# Altium PCB Ararinha_PCB.PcbDoc (part 2 of 2)
Units mm, origin at the board's own origin, x right, y up, seen from the top; angles counter-clockwise.
Board outline 118.49 x 71.75 mm, 4 copper layers (Component Side, GND, VCC, Solder Side), stack 0.844 mm thick; 218 components, 109 nets, 598 pads, 337 vias.
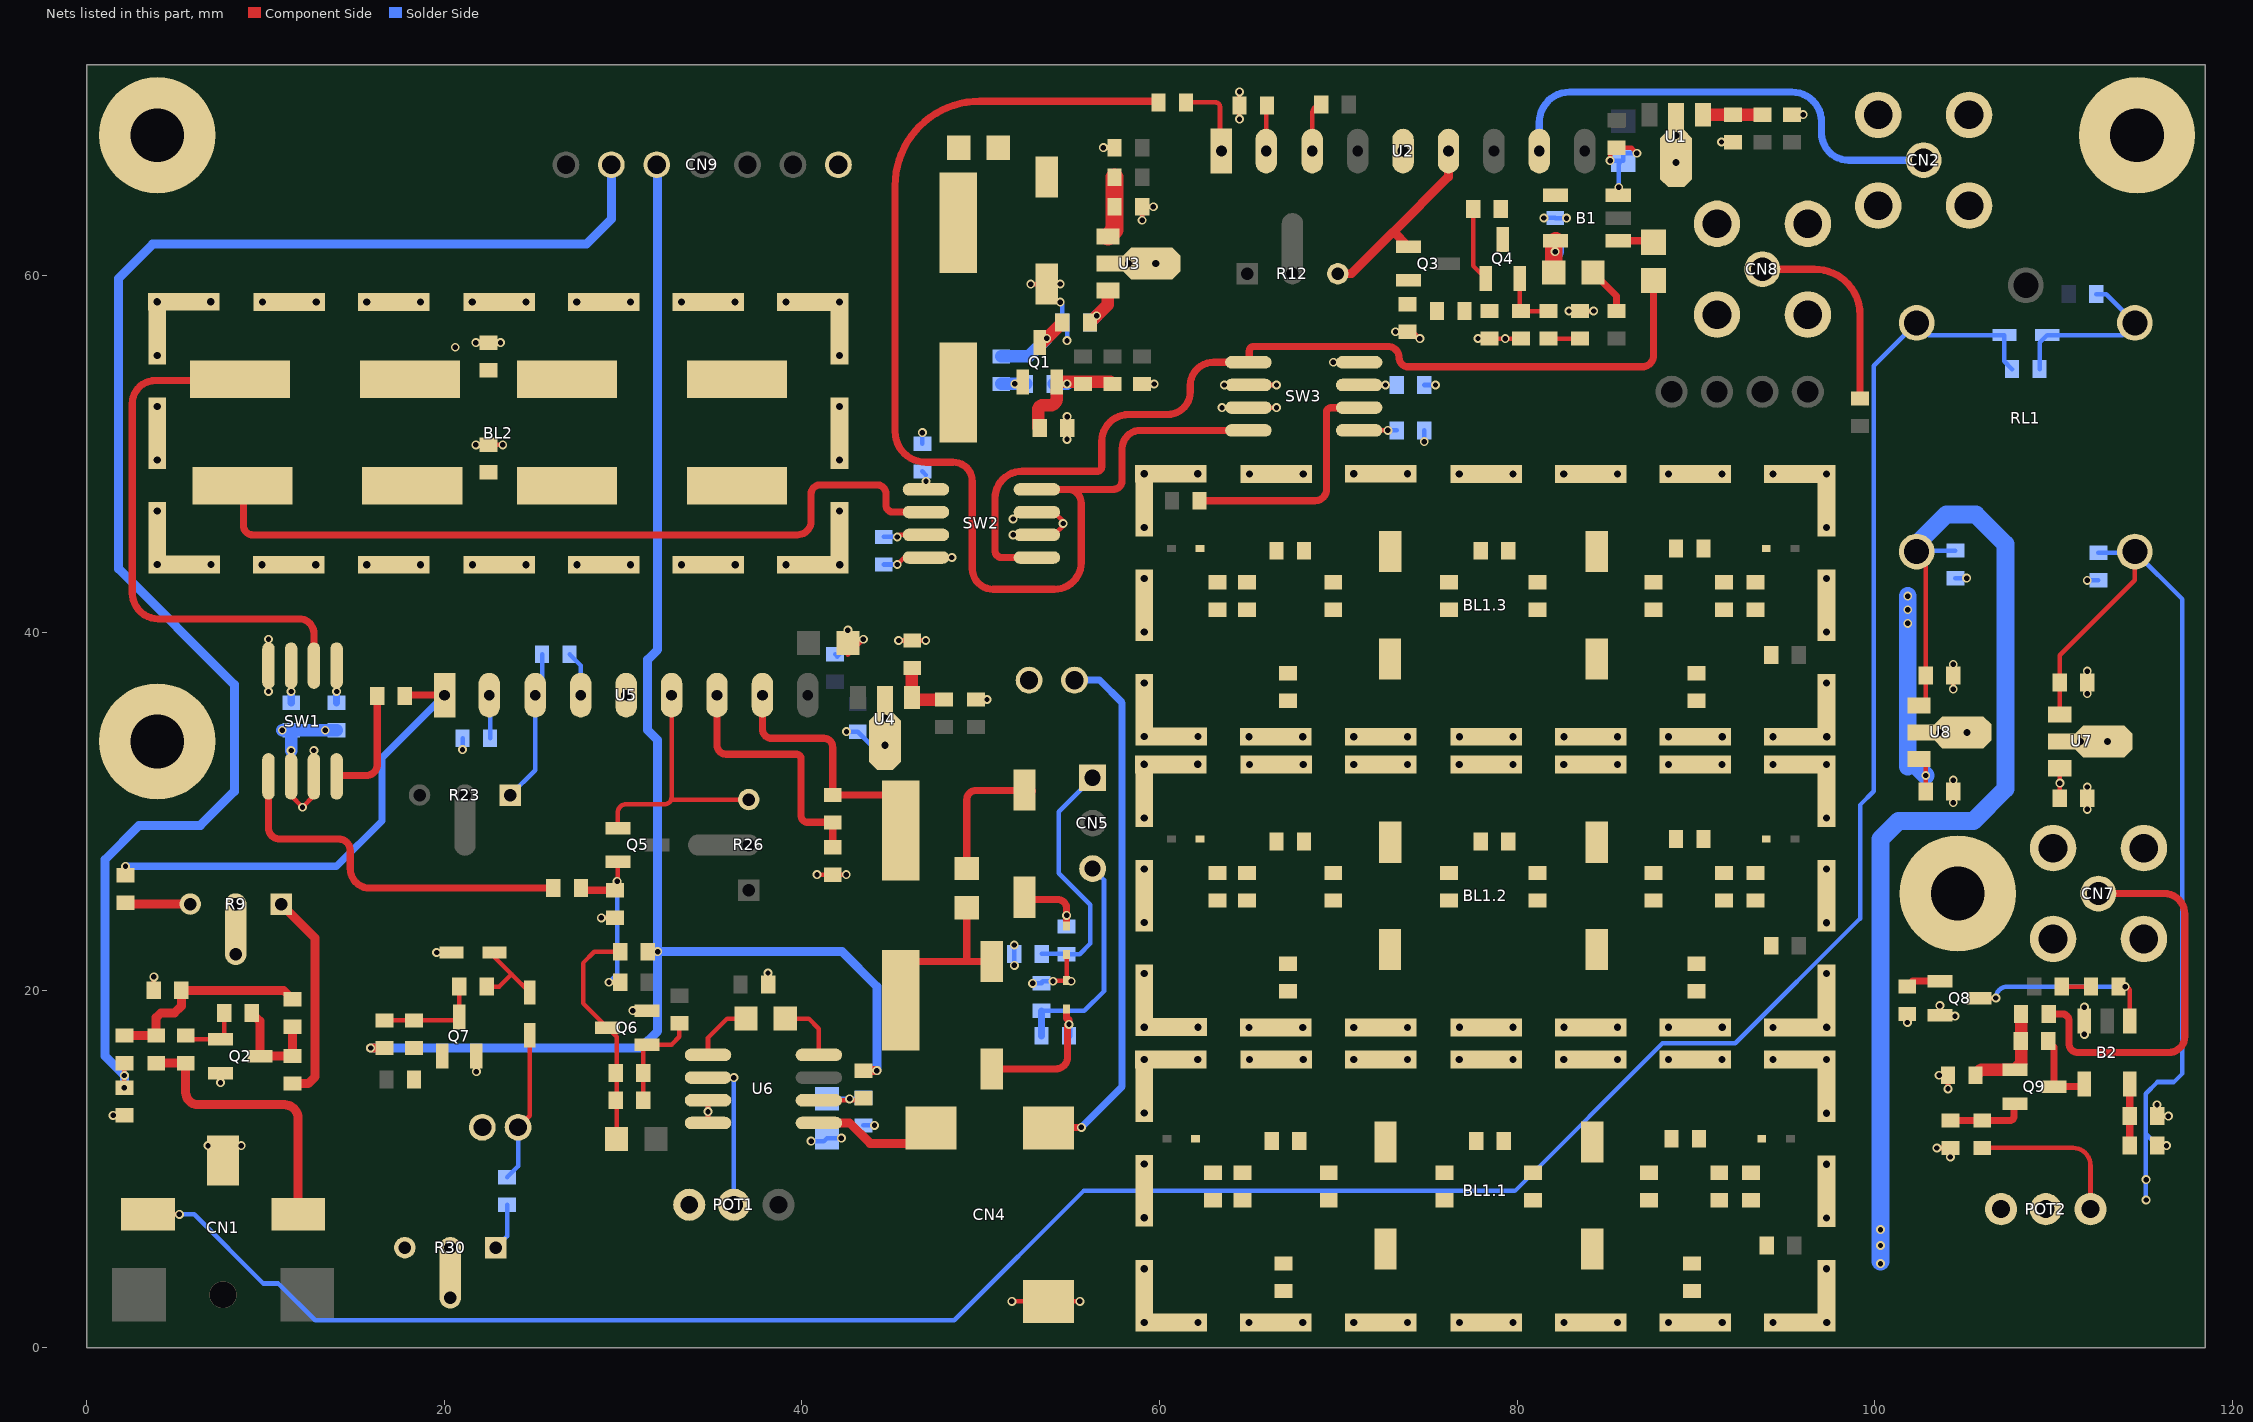
[diagram p4: the nets of this part, all layers, seen from the top]

## Via types
v1: diameter 0.5, hole 0.3, Component Side to Solder Side, 164 vias
v2: diameter 0.7, hole 0.4, Component Side to Solder Side, tented both sides, 162 vias
v3: diameter 1.2, hole 0.7, Component Side to Solder Side, 5 vias
v4: diameter 3.5, hole 2.4, Component Side to Solder Side, tented both sides, 4 vias
v5: diameter 1.5, hole 1.5, Component Side to Solder Side, tented both sides, 2 vias

## Nets (pads, with @x,y where several pads share a name; then routed paths per layer and width w, separated by ;. In a path a pad name is that pad's centre, name@x,y a point inside that pad or via, vN(x,y) a via of type N, cw(c..) or ccw(c..) an arc to the next point about the centre after c; other vN are vias at no path point) (continued)
GND: B1.3 B2.3 BL1.1.1 BL1.2.1 BL1.3.1 BL2.1 C1.1.1 C1.2.1 C1.3.1 C2.1.1 C2.2.1 C2.3.1 C3.2 C4.2 C5.1 C8.2 C9.2 C10.1 C11.1 C14.1 C15.1 C16.1 C17.1 C18.1 C19.2 C20.2 C25.1 C27.2 C28.2 C29.2 C30.1 C32.2 C34.2 C35.1 C36.2 C40.2 C41.2 C42.2 C46.2 C47.1 C49.1 C52.2 C54.1 C58.1 C59.1 C60.1 C61.1 C62.1 C63.1 C64.1 C65.1 C66.1 C67.1 C68.1 C69.1 C70.1 C71.1 CN1.1 CN2.2 CN2.3 CN2.4 CN2.5 CN3.2 CN4.1 CN7.2 CN7.3 CN7.4 CN7.5 CN8.2 CN8.3 CN8.4 CN8.5 CN9.7 D3.2 D4.2 D6.1 D7.1 HOLE1.X HOLE2.X HOLE3.X HOLE4.X POT1.3 POT2.2 POT2.3 Q2.2 Q6.2 Q7.2 Q8.2 R9.2 R14.1 R15.1 R16.1 R20.1 R30.3 R35.1 R36.1 RL1.1 SW1.4 SW1.6 SW1.7 SW2.4 SW2.6 SW2.7 SW3.4 SW3.6 SW3.7 U1.2 U2.5 U3.2 U4.2 U5.5 U6.3 U6.4 U7.2 U8.2 | length 114.5
  Component Side w0.254: v1@1.466,13.003 v1(1.474,12.995) C20.2@2.101,12.995 ; C19.2@3.744,19.988 v1(3.744,20.742) ; v1(6.774,11.303) cw(c6.774,10.457) CN1.1@7.62,10.457 cw(c8.466,10.457) 8.466,11.303 v1(8.636,11.303) ; v1(7.478,14.824) Q2.2@7.478,15.355 ; v1(10.16,36.703) SW1.4@10.16,38.152 v1(10.16,39.624) ; v1(11.43,33.401) SW1.6@11.43,31.952 11.43,30.861 v1(12.065,30.226) 12.7,30.861 SW1.7@12.7,31.952 v1(12.7,33.401) ; v1(19.566,22.104) D6.1@20.398,22.104 ; v1@21.752,50.512 v1(21.762,50.502) C18.1@22.47,50.502 v1(23.266,50.502) v1@23.276,50.512 ; v1(21.762,56.217) C17.1@22.47,56.217 v1(23.139,56.217) ; v1(21.786,15.434) Q7.2@21.786,16.305 ; v1(28.779,24.044) R20.1@29.533,24.044 ; v1(30.546,18.85) Q6.2@31.326,18.85 ; U6.4@34.746,12.566 U6.3@34.746,13.836 ; v1(38.1,20.955) 38.108,20.947 C49.1@38.108,20.313 ; v1(40.844,26.457) C25.1@41.725,26.457 v1(42.479,26.457) ; v1(42.571,40.138) C30.1@42.571,39.419 42.571,38.761 v1(43.434,39.624) ; v1(45.331,43.807) 45.72,44.196 SW2.4@46.938,44.196 v1(48.387,44.196) ; v1(45.408,39.554) C29.2@46.17,39.554 v1(46.924,39.554) v1@46.932,39.546 ; C28.2@49.726,36.252 v1(50.353,36.252) v1@50.361,36.244 ; v1(51.745,2.589) CN4.1@53.79,2.589 v1(55.548,2.589) ; v1(51.816,45.466) SW2.6@53.138,45.466 ; v1(51.816,46.355) 52.197,46.736 SW2.7@53.138,46.736 54.102,46.736 54.61,46.228 54.61,45.974 SW2.6@54.102,45.466 ; v1(52.798,59.489) C15.1@53.687,59.489 ; v1(54.044,20.496) cw(c54.082,20.496) 54.082,20.534 D3.2@54.806,20.534 ; v1(54.449,58.484) 54.322,58.484 53.948,58.857 cw(c54.58,59.489) C15.1@53.687,59.489 ; v1(54.449,59.5) 53.687,59.5 C15.1@53.687,59.489 ; D4.2@54.806,21.982 D3.2@54.806,20.534 ; v1(54.83,50.81) 54.83,51.445 C14.1@54.838,51.445 v1(54.838,52.08) ; v1(55.06,20.496) 54.844,20.496 cw(c54.844,20.534) D3.2@54.806,20.534 ; v1(56.862,67.12) C10.1@57.243,67.12 ; C16.1@59.021,53.904 v1(59.702,53.904) ; v1(59.029,63.064) C35.1@59.029,63.818 v1(59.656,63.818) ; v1(63.5,52.578) SW3.7@64.972,52.578 v1(66.548,52.578) ; v1(63.627,53.848) SW3.6@64.972,53.848 v1(66.548,53.848) ; v1(64.474,68.717) C9.2@64.474,69.479 v1(64.474,70.241) ; v1(69.723,55.118) SW3.4@71.172,55.118 ; v1(73.199,56.825) R14.1@73.88,56.825 74.18,56.825 v1(74.561,56.444) ; v1(77.817,56.452) 77.825,56.444 R16.1@80.23,56.444 ; v1(82.905,57.984) C27.2@83.532,57.984 v1(84.286,57.984) ; v1(85.213,66.401) 85.213,66.761 C8.2@85.564,67.112 86.407,67.112 v1(86.707,66.812) ; v1(91.44,67.437) 91.448,67.429 C4.2@92.075,67.429 ; C3.2@95.377,68.969 v1(96.004,68.969) v1@96.012,68.961 ; v1(103.481,11.166) R36.1@104.243,11.166 v1(104.243,10.666) ; v1(103.608,15.238) R35.1@104.108,15.238 v1(104.108,14.476) ; v1(103.651,19.132) Q8.2@103.651,18.606 104.431,18.606 cw(c104.431,18.54) v1(104.497,18.54) ; v1(104.402,30.488) C67.1@104.402,31.115 v1(104.402,31.742) ; v1(104.402,36.838) C66.1@104.402,37.592 v1(104.402,38.219) ; v1(111.736,17.524) B2.3@111.736,18.258 v1(111.736,19.048) ; v1(111.895,30.107) C65.1@111.895,30.734 v1(111.895,31.361) ; v1(111.895,36.584) C64.1@111.895,37.211 v1(111.895,37.838) ; v1(115.8,13.587) 115.808,13.587 C54.1@115.808,12.952 v1(116.435,12.952)
  Solder Side w0.254: C34.2@21.016,34.085 v1(21.016,33.45) v1@21.024,33.45 ; v1(40.513,11.55) 41.232,11.55 C47.1@41.402,11.72 v1(42.207,11.72) ; C42.2@41.852,38.792 41.987,38.657 42.954,39.624 v1(43.434,39.624) ; v1(42.495,34.458) C32.2@43.122,34.458 43.88,33.7 v2(44.646,33.7) ; C46.2@43.434,12.431 v1(44.061,12.431) v1@44.069,12.439 ; C63.1@44.577,43.807 v1(45.331,43.807) ; C60.1@46.736,50.554 v1(46.736,51.181) ; v1(51.877,22.52) C41.2@51.877,22.02 51.877,21.385 v1(51.885,21.385) ; v1@52.901,20.369 v1(52.901,20.377) C40.2@53.409,20.377 cw(c53.528,20.377) 53.528,20.496 v1(54.044,20.496) ; v1(54.449,58.484) 54.568,58.365 C11.1@54.568,57.341 54.83,57.079 v1(54.83,56.325) ; v1(74.811,50.681) C62.1@74.811,51.308 ; C59.1@74.811,53.848 v1(75.438,53.848) ; v1(81.5,63.191) C36.2@82.135,63.191 82.135,63.183 v1(82.77,63.183) ; v1(85.213,66.401) C5.1@85.945,66.401 ; v1(85.691,64.907) 85.691,66.147 cw(c85.945,66.147) C5.1@85.945,66.401 ; v1(86.707,66.812) 85.945,66.812 C5.1@85.945,66.401 ; C71.1@104.521,43.045 v1(105.148,43.045) ; C68.1@109.228,54.737 109.228,56.212 D7.1@109.658,56.642 RL1.1@113.873,56.642 ; v1(111.895,42.918) C70.1@112.522,42.918 ; C69.1@112.403,58.928 112.957,58.928 RL1.1@114.558,57.327
  Solder Side w0.7: v1@10.922,34.544 v1(10.93,34.536) C58.1@11.43,34.536 ; v1(11.43,33.401) C58.1@11.43,34.536 ; C61.1@13.97,34.536 v1(13.335,34.536) C58.1@11.43,34.536
  other v1: 34.746,13.201 54.61,46.101 20.607,55.959 79.341,56.444
  other v2: 65.015,1.407 68.015,1.407 70.865,1.407 73.865,1.407 76.777,1.407 79.777,1.407 82.627,1.407 85.627,1.407 88.477,1.407 91.477,1.407 94.327,1.407 97.326,1.407 59.147,1.415 62.147,1.415 97.317,1.411 59.147,4.415 97.317,4.411 59.147,7.265 97.317,7.261 59.147,10.265 97.317,10.261 59.147,13.115 97.317,13.111 59.147,16.115 65.042,16.108 68.042,16.108 70.865,16.116 73.865,16.116 76.767,16.111 79.767,16.111 82.617,16.111 85.617,16.111 88.467,16.111 91.467,16.111 94.317,16.111 97.317,16.111 59.138,16.119 62.137,16.119 65.015,17.917 68.015,17.917 70.865,17.917 73.865,17.917 76.777,17.917 79.777,17.917 82.627,17.917 85.627,17.917 88.477,17.917 91.477,17.917 94.327,17.917 97.326,17.917 59.147,17.925 62.147,17.925 97.317,17.921 59.147,20.925 97.317,20.921 59.147,23.775 97.317,23.771 59.147,26.775 97.317,26.771 59.147,29.625 97.317,29.621 59.147,32.625 65.042,32.618 68.042,32.618 70.865,32.626 73.865,32.626 76.767,32.621 79.767,32.621 82.617,32.621 85.617,32.621 88.467,32.621 91.467,32.621 94.317,32.621 97.317,32.621 59.138,32.629 62.137,32.629 111.514,33.909 113.034,33.909 65.015,34.173 68.015,34.173 70.865,34.173 73.865,34.173 76.777,34.173 79.777,34.173 82.627,34.173 85.627,34.173 88.477,34.173 91.477,34.173 94.327,34.173 97.326,34.173 59.147,34.181 62.147,34.181 97.317,34.177 103.64,34.417 105.16,34.417 44.646,35.22 59.147,37.181 97.317,37.177 59.147,40.031 97.317,40.027 59.147,43.031 97.317,43.027 3.937,43.799 6.936,43.799 9.804,43.791 12.804,43.791 15.654,43.791 18.654,43.791 21.566,43.791 24.566,43.791 27.416,43.791 30.416,43.791 33.266,43.791 36.266,43.791 39.116,43.791 42.106,43.794 42.116,43.791 59.147,45.881 97.317,45.877 3.936,46.799 42.106,46.794 59.147,48.881 65.042,48.874 68.042,48.874 70.865,48.882 73.865,48.882 76.767,48.877 79.767,48.877 82.617,48.877 85.617,48.877 88.467,48.877 91.467,48.877 94.317,48.877 97.317,48.877 59.138,48.885 62.137,48.885 3.937,49.649 42.106,49.644 3.937,52.649 42.106,52.644 3.937,55.499 42.107,55.494 3.927,58.503 3.937,58.499 6.927,58.503 9.832,58.491 12.831,58.491 15.654,58.499 18.654,58.499 21.557,58.495 24.557,58.495 27.407,58.495 30.407,58.495 33.257,58.495 36.257,58.495 39.107,58.495 42.106,58.495 58.267,60.643 59.787,60.643 88.9,66.29 88.9,67.81
  other v3: 8.324,22.014
  other v5: 7.62,2.957
IF_PRE: Q5.1 R26.3 U5.6 | length 14.4
  Component Side w0.254: Q5.1@29.703,29.066 29.703,29.937 cw(c30.168,29.937) 30.168,30.402 32.327,30.402 ccw(c32.327,30.783) 32.708,30.783 U5.6@32.708,36.498 ; 32.708,30.656 R26.3@37.026,30.656
IFIN: C31.1 SW1.8 | length 6.5
  Component Side w0.4: SW1.8@13.97,31.952 cw(c14.022,31.952) 14.022,32.004 15.621,32.004 ccw(c15.621,32.631) 16.248,32.631 C31.1@16.248,36.449
IFOUT: C38.2 SW1.5 | length 21.2
  Component Side w0.4: SW1.5@10.16,31.952 10.16,29.083 ccw(c10.795,29.083) 10.795,28.448 14.097,28.448 cw(c14.097,27.813) 14.732,27.813 14.732,26.797 ccw(c15.826,26.797) 15.826,25.703 C38.2@26.096,25.703
LSB: C41.1 CN5.1 R22.2 | length 13.8
  Solder Side w0.254: C41.1@53.417,22.02 R22.2@54.806,22.02 ; R22.2@54.806,22.012 55.54,22.012 56.134,22.606 56.134,24.765 54.356,26.543 54.356,29.972 CN5.1@56.261,31.877
MIC: C22.2 CN1.2 R7.1 | length 15.8
  Component Side w0.5: R7.1@3.879,15.916 C22.2@5.53,15.916 5.53,14.282 ccw(c6.223,14.282) 6.223,13.589 11.049,13.589 cw(c11.049,12.827) 11.811,12.827 CN1.2@11.811,7.457
MIXERIN: C6.2 SW2.8 SW3.8 | length 68.8
  Component Side w0.4: SW2.8@53.265,48.133 ccw(c53.265,48.006) 53.213,48.122 ccw(c53.265,48.006) SW2.8@53.138,48.006 54.864,48.006 ; C6.2@59.948,69.652 ccw(c59.876,69.652) 59.876,69.723 49.949,69.723 ccw(c49.949,64.986) 45.212,64.986 45.212,51.242 ccw(c46.924,51.242) 46.924,49.53 48.455,49.53 cw(c48.455,48.455) 49.53,48.455 49.53,43.582 ccw(c50.694,43.582) 50.694,42.418 54.115,42.418 ccw(c54.115,43.929) 55.626,43.929 55.626,47.244 ccw(c54.864,47.244) 54.864,48.006 ; SW3.8@64.972,51.308 58.928,51.308 ccw(c58.928,50.292) 57.912,50.292 57.912,48.514 cw(c57.404,48.514) 57.404,48.006 54.864,48.006
MIXEROUT: R11.2 SW2.5 SW3.5 | length 53.4
  Component Side w0.4: SW2.5@53.138,44.196 51.181,44.196 cw(c51.181,44.577) 50.8,44.577 50.8,47.511 cw(c52.311,47.511) 52.311,49.022 56.515,49.022 ccw(c56.515,49.276) 56.769,49.276 56.769,50.686 cw(c58.28,50.686) 58.28,52.197 60.452,52.197 ccw(c60.452,53.467) 61.722,53.467 61.722,53.817 cw(c63.023,53.817) 63.023,55.118 SW3.5@64.972,55.118 ccw(c64.972,55.17) 65.024,55.17 65.024,55.753 cw(c65.278,55.753) 65.278,56.007 72.771,56.007 cw(c72.771,55.372) 73.406,55.372 ccw(c73.914,55.372) 73.914,54.864 86.995,54.864 ccw(c86.995,55.511) 87.642,55.511 R11.2@87.642,59.692
NetB1_1: B1.1 R11.1 | length 2.1
  Component Side w0.4: B1.1@85.663,61.913 87.669,61.913 cw(c87.669,61.859) R11.1@87.723,61.859
NetB1_4: B1.4 Q4.3 R13.2
NetB1_6: B1.6 C36.1 R10.1 | length 2.2
  Component Side w1: R10.1@82.051,60.135 82.051,61.801 B1.6@82.163,61.913
  Solder Side w1: v1(82.135,61.307) C36.1@82.135,61.651
NetB2_1: B2.1 Q8.3 R32.1 | length 11
  Component Side w0.254: Q8.3@105.851,19.556 v1(106.783,19.556) ; R32.1@113.649,20.191 v1(114.022,20.191) cw(c114.022,19.937) 114.276,19.937 B2.1@114.276,18.258
  Solder Side w0.254: v1(106.783,19.556) cw(c107.418,19.556) 107.418,20.191 v1(114.022,20.191)
NetB2_4: B2.4 Q9.3 R34.2 | length 3.7
  Component Side w0.4: R34.2@110.042,16.813 Q9.3@110.042,14.603 B2.4@111.581,14.603
NetB2_6: B2.6 C54.2 R31.1 | length 3.5
  Component Side w0.4: R31.1@114.268,11.301 114.276,11.309 B2.6@114.276,14.758
NetC1.1_2: C1.1.2 C2.1.2 CF1.1.1 CF3.1.2 CF4.1.1 CF6.1.1 CF7.1.1 CF9.1.2 LF1.1.1 LF2.1.1 R1.1.1 R2.1.1 R3.1.1
NetC1.2_2: C1.2.2 C2.2.2 CF1.2.1 CF3.2.2 CF4.2.1 CF6.2.1 CF7.2.1 CF9.2.2 LF1.2.1 LF2.2.1 R1.2.1 R2.2.1 R3.2.1
NetC1.3_2: C1.3.2 C2.3.2 CF1.3.1 CF3.3.2 CF4.3.1 CF6.3.1 CF7.3.1 CF9.3.2 LF1.3.1 LF2.3.1 R1.3.1 R2.3.1 R3.3.1
NetC4_1: C4.1 L1.2 U1.1 | length 3.3
  Component Side w0.7: U1.1@90.409,68.969 L1.2@93.726,68.969
NetC6_1: C6.1 U2.1 | length 4.6
  Component Side w0.254: C6.1@61.488,69.652 63.131,69.652 cw(c63.131,69.398) 63.385,69.398 63.385,67.015 ccw(c63.466,67.015) U2.1@63.466,66.934
NetC7_2: C7.2 U2.3 | length 2.9
  Component Side w0.254: U2.3@68.546,66.934 68.546,69.033 cw(c69.046,69.033) C7.2@69.046,69.533
NetC9_1: C9.1 U2.2 | length 2.6
  Component Side w0.254: U2.2@65.966,66.934 65.966,69.431 cw(c66.014,69.431) C9.1@66.014,69.479
NetC11_2: C11.2 R18.2 U3.3 | length 2.8
  Component Side w0.7: R18.2@56.108,57.341 57.117,58.35 U3.3@57.117,59.143
  Solder Side w0.7: C11.2@56.108,57.341 56.481,57.714 v1(56.481,57.722)
NetC12_1: C12.1 C13.1 C14.2 Q1.2 R5.2 | length 7.3
  Component Side w0.254: C14.2@53.298,51.445 ccw(c53.298,51.58) C14.2@53.433,51.58
  Component Side w0.7: C14.2@53.298,51.445 cw(c53.298,51.529) 53.213,51.529 53.213,52.451 cw(c53.467,52.451) 53.467,52.705 53.848,52.705 ccw(c53.848,53.113) 54.256,53.113 Q1.2@54.256,54.023 55.719,54.023 C13.1@57.251,54.023
  Solder Side w0.7: C12.1@54.076,53.912 v1(54.83,53.912)
NetC12_2: C12.2 Q1.1 R4.1 X1.2 | length 1.4
  Solder Side w0.7: R4.1@51.147,53.904 C12.2@52.536,53.904
  other v1: 51.909,53.912
NetC15_2: C15.2 L3.1
NetC17_2: C17.2 X2.2 X3.1
NetC18_2: C18.2 X4.2 X5.1
NetC19_1: C19.1 L4.1 R6.2 R7.2 | length 11.8
  Component Side w0.5: L4.1@2.101,17.456 R7.2@3.879,17.456 3.879,18.464 4.133,18.718 4.895,18.718 5.284,19.107 C19.1@5.284,19.988 10.999,19.988 R6.2@11.499,19.488
NetC21_1: C21.1 R9.1 | length 11.9
  Component Side w0.5: R9.1@10.864,24.814 12.769,22.909 12.769,15.162 12.38,14.773 C21.1@11.499,14.773
NetC21_2: C21.2 Q2.3 R6.1 R8.2 | length 6.1
  Component Side w0.5: R8.2@9.221,18.718 9.678,18.261 Q2.3@9.678,16.305 ; Q2.3@9.686,16.313 C21.2@11.499,16.313 R6.1@11.499,17.948
NetC22_1: C22.1 Q2.1 R8.1 | length 3.1
  Component Side w0.254: C22.1@5.731,17.255 Q2.1@7.478,17.255 Q2.1@7.605,17.255 ; Q2.1@7.681,17.458 R8.1@7.681,18.718
NetC23_2: C23.2 R9.3 | length 3.5
  Component Side w0.5: C23.2@2.228,24.822 R9.3@5.776,24.822
NetC24_1: C24.1 C25.2 U5.7 | length 14.5
  Component Side w0.4: U5.7@35.248,36.498 35.248,33.704 ccw(c35.756,33.704) 35.756,33.196 39.693,33.196 cw(c39.693,32.942) 39.947,32.942 39.947,29.767 ccw(c40.328,29.767) 40.328,29.386 C24.1@41.725,29.386 ; C25.2@41.725,27.997 C24.1@41.725,29.378
NetC24_2: C24.2 U5.8 X6.2 | length 12.9
  Component Side w0.4: U5.8@37.788,36.498 37.788,34.593 ccw(c38.296,34.593) 38.296,34.085 41.217,34.085 cw(c41.217,33.577) 41.725,33.577 C24.2@41.725,30.918 X6.2@45.535,30.918
NetC26_1: C26.1 Q4.1 R13.1 R15.2 | length 4.2
  Component Side w0.254: R13.1@77.555,63.691 77.555,60.506 Q4.1@78.264,59.797
NetC26_2: C26.2 Q3.2 R14.2
NetC27_1: C27.1 R17.1 | length 1.8
  Component Side w0.254: R17.1@81.754,56.444 C27.1@83.532,56.444
NetC29_1: C29.1 L5.2 U4.1 | length 3.3
  Component Side w0.7: U4.1@46.146,36.37 C29.1@46.146,37.99 ; U4.1@46.264,36.252 L5.2@47.948,36.252
NetC33_1: C33.1 U5.4 | length 2.5
  Solder Side w0.254: C33.1@27.001,38.784 27.628,38.157 U5.4@27.628,36.498
NetC33_2: C33.2 R23.1 U5.3 | length 8.8
  Solder Side w0.254: R23.1@23.691,30.91 25.088,32.307 U5.3@25.088,36.498 25.461,36.498 C33.2@25.461,38.784
NetC34_1: C34.1 U5.2 | length 2.4
  Solder Side w0.254: U5.2@22.508,36.498 cw(c22.508,36.45) 22.556,36.45 C34.1@22.556,34.085
NetC35_2: C35.2 L2.2 U3.1 | length 3.5
  Component Side w1: U3.1@57.117,62.143 57.489,62.515 C35.2@57.489,63.818 L2.2@57.489,65.469
NetC37_1: C37.1 D3.1 R21.2 | length 8.1
  Component Side w0.4: C37.1@50.615,15.591 54.199,15.591 ccw(c54.199,16.256) 54.864,16.256 54.864,18.014 cw(c54.933,18.014) 54.933,18.083 54.933,18.337 cw(c54.933,18.464) 54.806,18.464 D3.1@54.806,18.934
  Solder Side w0.4: R21.2@54.941,17.448 v1(54.941,18.083)
NetC37_2: C37.2 L7.2 X6.1 | length 10.3
  Component Side w0.4: X6.1@45.535,19.429 45.535,21.591 49.218,21.591 ; L7.2@49.218,24.603 49.218,21.591 ; C37.2@50.616,21.591 49.218,21.591
NetC38_1: C38.1 Q5.2 R19.1 R20.2 | length 9.8
  Component Side w0.254: v1(29.208,20.44) R19.1@29.837,20.44 ; R20.2@29.703,25.754 Q5.2@29.703,27.166
  Component Side w0.4: C38.1@27.636,25.703 ccw(c27.755,25.703) 27.755,25.584 R20.2@29.533,25.584
  Solder Side w0.254: v1(29.208,20.44) 29.66,20.892 v1(29.66,26.084)
NetC39_1: C39.1 D4.1 R22.1 | length 3.8
  Component Side w0.4: C39.1@52.901,25.116 ccw(c52.949,25.116) 52.949,25.068 54.298,25.068 cw(c54.298,24.56) 54.806,24.56 D4.1@54.806,23.582
  Solder Side w0.4: R22.1@54.806,23.552 v1(54.806,24.179)
NetC39_2: C39.2 L7.1 | length 7.9
  Component Side w0.4: L7.1@49.218,26.803 49.218,30.656 cw(c49.726,30.656) 49.726,31.164 52.854,31.164 cw(c52.854,31.116) C39.2@52.902,31.116
NetC43_1: C43.1 U6.1 | length 3.5
  Component Side w0.254: U6.1@34.746,16.376 34.746,17.327 35.827,18.408 C43.1@36.873,18.408
NetC43_2: C43.2 U6.8 | length 3.6
  Component Side w0.254: C43.2@39.073,18.408 40.384,18.408 40.946,17.846 U6.8@40.946,16.376
NetC44_1: C44.1 C48.2 Q6.1 R25.1 | length 6
  Component Side w0.254: R25.1@31.123,13.836 C44.1@31.123,15.36 31.123,16.747 Q6.1@31.326,16.95 32.705,16.95 33.147,17.392 C48.2@33.147,18.146
NetC44_2: C44.2 C45.1 Q6.3 R24.1 R25.2 | length 13
  Component Side w0.254: C45.1@29.634,11.677 29.634,17.392 Q6.3@29.126,17.9 27.755,19.271 27.755,21.512 28.39,22.147 R24.1@29.837,22.147
NetC46_1: C46.1 C47.2 L8.1 U6.6 | length 4.4
  Component Side w0.254: U6.6@40.946,13.836 L8.1@43.315,13.836
  Solder Side w0.254: C47.2@41.402,13.92 v1(42.672,13.92) 43.383,13.92 C46.1@43.434,13.971
NetC50_1: C50.1 Q7.3 R27.1 R28.2 | length 6
  Component Side w0.254: R27.1@16.645,18.302 R28.2@18.296,18.302 20.633,18.302 ccw(c20.633,18.505) Q7.3@20.836,18.505 20.836,20.199 C50.1@20.828,20.199
NetC50_2: C50.2 D5.1 D6.2 | length 4.5
  Component Side w0.254: C50.2@22.368,20.199 23.065,20.199 23.757,20.891 ; D6.2@22.798,21.85 23.757,20.891 ; D5.1@24.773,19.875 23.757,20.891
NetC51_2: C51.2 Q7.1 R28.1
NetC52_1: C52.1 D5.2 R29.1 | length 8.5
  Component Side w0.254: C52.1@24.122,12.325 24.773,12.976 D5.2@24.773,17.475
  Solder Side w0.254: R29.1@23.503,9.539 24.122,10.158 C52.1@24.122,12.325
NetC53_2: C53.2 R32.2 | length 1.6
  Component Side w0.254: C53.2@110.474,20.191 R32.2@112.109,20.191
NetC55_1: C55.1 Q9.1 R34.1 R35.2 | length 5.6
  Component Side w0.7: R35.2@105.648,15.238 105.963,15.553 Q9.1@107.842,15.553 108.196,15.907 C55.1@108.196,18.669
NetC56_1: C56.1 POT2.1 | length 9.1
  Component Side w0.254: C56.1@106.021,11.174 111.101,11.174 cw(c111.101,10.198) 112.077,10.198 POT2.1@112.077,7.745
NetC56_2: C56.2 Q9.2 R36.2 | length 4.4
  Component Side w0.4: R36.2@104.243,12.706 C56.2@106.021,12.706 107.553,12.706 ccw(c107.553,12.952) 107.799,12.952 107.799,13.61 cw(c107.842,13.61) Q9.2@107.842,13.653
NetC57_1: C57.1 SW3.2 | length 13.8
  Component Side w0.4: C57.1@62.238,47.371 68.707,47.371 ccw(c68.707,48.006) 69.342,48.006 69.342,52.324 cw(c69.596,52.324) 69.596,52.578 SW3.2@71.172,52.578
NetC72_1: C72.1 CN8.1 | length 11.6
  Component Side w0.4: CN8.1@93.726,60.325 96.647,60.325 cw(c96.647,57.785) 99.187,57.785 C72.1@99.187,53.094
NetCF1.1_2: CF1.1.2 CF2.1.2 D1.1.1 R1.1.2
NetCF1.2_2: CF1.2.2 CF2.2.2 D1.2.1 R1.2.2
NetCF1.3_2: CF1.3.2 CF2.3.2 D1.3.1 R1.3.2
NetCF2.1_1: CF2.1.1 CF3.1.1 CF4.1.2 CF5.1.1 LF1.1.2
NetCF2.2_1: CF2.2.1 CF3.2.1 CF4.2.2 CF5.2.1 LF1.2.2
NetCF2.3_1: CF2.3.1 CF3.3.1 CF4.3.2 CF5.3.1 LF1.3.2
NetCF5.1_2: CF5.1.2 CF6.1.2 CF7.1.2 CF8.1.2 LF2.1.2
NetCF5.2_2: CF5.2.2 CF6.2.2 CF7.2.2 CF8.2.2 LF2.2.2
NetCF5.3_2: CF5.3.2 CF6.3.2 CF7.3.2 CF8.3.2 LF2.3.2
NetCF8.1_1: CF8.1.1 CF9.1.1 D2.1.1 R2.1.2
NetCF8.2_1: CF8.2.1 CF9.2.1 D2.2.1 R2.2.2
NetCF8.3_1: CF8.3.1 CF9.3.1 D2.3.1 R2.3.2
NetCN3_1: CN3.1 CN4.3 | length 29.7
  Component Side w0.4: CN4.3@53.79,12.289 cw(c53.82,12.289) 53.82,12.319 v1(55.626,12.319)
  Solder Side w0.4: CN3.1@55.245,37.338 56.642,37.338 57.912,36.068 57.912,14.605 v1(55.626,12.319)
NetL3_2: L3.2 X1.1
NetL6_2: L6.2 R10.2 | length 2.7
  Component Side w0.4: R10.2@84.251,60.135 85.564,58.822 L6.2@85.564,57.984
NetPOT1_2: POT1.2 U6.2 | length 8.6
  Component Side w0.254: U6.2@34.746,15.106 v1(36.195,15.106)
  Solder Side w0.254: POT1.2@36.195,7.994 v1(36.195,15.106)
NetQ1_3: Q1.3 R4.2 R18.1 | length 4.5
  Component Side w0.7: Q1.3@53.45,56.223 R18.1@54.568,57.341
  Solder Side w0.7: R4.2@51.147,55.444 52.679,55.444 v1(53.694,56.46)
NetQ3_1: Q3.1 R12.3 U2.6 | length 10.8
  Component Side w0.5: R12.3@70.231,60.071 70.739,60.071 73.089,62.421 73.095,62.421 ; Q3.1@73.923,61.593 73.095,62.421 ; U2.6@76.166,66.934 76.166,65.492 73.095,62.421
NetQ4_2: Q4.2 R16.2 R17.2 | length 3.1
  Component Side w0.254: R16.2@80.164,58.172 Q4.2@80.164,59.797 ; R16.2@80.23,57.984 R17.2@81.754,57.984
NetQ8_1: Q8.1 R33.1 | length 1.5
  Component Side w0.4: R33.1@102.137,20.506 Q8.1@103.651,20.506
NetR29_2: R29.2 R30.1 | length 2.7
  Solder Side w0.254: R30.1@22.868,5.594 23.503,6.229 R29.2@23.503,7.999
NetX3_2: X3.2 X4.1
PIN1: C23.1 C31.2 U5.1 | length 26.6
  Component Side w0.4: C23.1@2.159,26.424 v1(2.159,26.924) ; C31.2@17.788,36.449 cw(c17.837,36.449) 17.837,36.498 U5.1@20.008,36.498
  Solder Side w0.4: v1(2.159,26.924) 13.97,26.924 16.51,29.464 16.51,33 U5.1@20.008,36.498
PTT: C68.2 CN1.3 D7.2 RL1.5 | length 148.5
  Component Side w0.254: CN1.3@3.42,7.457 v1(5.171,7.457)
  Solder Side w0.254: v1(5.171,7.457) 6.005,7.457 9.874,3.588 10.711,3.588 12.775,1.524 48.514,1.524 55.753,8.763 79.883,8.763 88.138,17.018 92.202,17.018 99.187,24.003 99.187,30.353 99.949,31.115 99.949,54.918 RL1.5@102.358,57.327 ; RL1.5@103.043,56.642 D7.2@107.258,56.642 107.258,55.167 C68.2@107.688,54.737
RX: C64.2 C70.2 CN9.3 L8.2 R24.2 R27.2 R31.2 RL1.4 U7.1 | length 138.3
  Component Side w0.254: R24.2@31.377,22.147 v1(31.926,22.147) ; U7.1@110.355,35.418 C64.2@110.355,37.211 110.355,38.727 114.558,42.93 RL1.4@114.558,44.527
  Component Side w0.5: v1(15.877,16.762) R27.2@16.645,16.762 ; L8.2@43.434,15.495 v1(44.188,15.495)
  Solder Side w0.254: CN9.3@31.727,66.017 CN9.3@31.877,66.167 ; C70.2@112.522,44.458 RL1.4@114.489,44.458 ; RL1.4@114.558,44.527 117.221,41.864 117.221,15.334 116.746,14.859 115.824,14.859 115.169,14.204 115.169,8.279 v1(115.191,8.257) ; 115.191,11.936 115.826,11.301 v1(116.33,11.301)
  Solder Side w0.5: v1(15.877,16.762) 30.986,16.762 31.926,17.702 v1(31.926,22.147) ; CN9.3@31.727,66.017 31.926,65.818 31.926,39.038 31.369,38.481 31.369,34.544 31.926,33.987 v1(31.926,22.147) ; v1(44.188,15.495) 44.188,20.201 42.242,22.147 v1(31.926,22.147)
  other v1: 115.191,9.398
RX_5V: C61.2 C62.2 C63.2 C65.2 SW1.1 SW2.3 SW3.1 U7.3 | length 6.6
  Component Side w0.254: v1@45.45,45.466 SW2.3@46.938,45.466 ; SW3.1@71.172,51.308 v1(72.771,51.308) ; C65.2@110.364,30.743 U7.3@110.364,32.409
  Solder Side w0.254: C63.2@44.577,45.347 v1(45.331,45.347) ; v1(72.771,51.308) C62.2@73.271,51.308
  Solder Side w0.4: C61.2@13.97,36.076 v1(13.97,36.703)
  other v1: 110.364,31.576
RXANT: C55.2 CN7.1 | length 22.2
  Component Side w0.4: C55.2@109.736,18.669 110.49,18.669 cw(c110.49,18.288) 110.871,18.288 110.871,17.018 ccw(c111.379,17.018) 111.379,16.51 116.459,16.51 ccw(c116.459,17.399) 117.348,17.399 117.348,24.257 ccw(c116.205,24.257) 116.205,25.4 CN7.1@112.522,25.4
SPK_OUT: CN4.2 U6.5 | length 7.1
  Component Side w0.5: U6.5@40.946,12.566 42.672,12.566 43.815,11.423 46.359,11.423 CN4.2@47.225,12.289
TX: C20.1 C66.2 C71.2 CN9.2 L4.2 RL1.2 U8.1 | length 148.8
  Component Side w0.254: C20.1@2.101,14.535 v1(2.101,15.226) L4.2@2.101,15.916 ; U8.1@102.862,36.289 RL1.2@102.862,44.023
  Solder Side w0.254: RL1.2@102.416,44.585 C71.2@104.521,44.585
  Solder Side w0.5: v1(2.101,14.547) v1(2.101,15.226) 1.016,16.31 1.016,27.305 2.921,29.21 6.35,29.21 8.255,31.115 8.255,37.084 1.778,43.561 1.778,59.817 3.683,61.722 27.94,61.722 29.337,63.119 CN9.2@29.337,66.167
  Solder Side w1: v1@100.33,4.826 v1(100.33,5.715) v1(100.33,6.604) 100.33,28.448 101.346,29.464 105.537,29.464 107.315,31.242 107.315,44.958 105.664,46.609 104.013,46.609 102.358,44.954 RL1.2@102.358,44.527
  other v1: 100.33,4.699
TX_5V: C58.2 C59.2 C60.2 C67.2 SW1.3 SW2.1 SW3.3 U8.3 | length 15.2
  Component Side w0.254: SW2.1@46.938,48.006 v1(46.938,48.462) ; SW3.3@71.172,53.848 v1(72.644,53.848) ; C67.2@102.862,31.115 v1(102.862,32.004) U8.3@102.862,32.545
  Solder Side w0.254: C60.2@46.736,49.014 C60.2@46.938,48.812
  Solder Side w0.4: C58.2@11.43,36.076 v1(11.43,36.703)
  Solder Side w1: 101.854,32.504 v1(101.854,42.037) ; 101.854,33.012 v1(102.862,32.004)
  other v1: 101.854,40.513 101.854,41.275
USB: C40.1 CN5.3 R21.1 | length 12.5
  Solder Side w0.254: C40.1@53.401,18.837 C40.1@53.409,18.837 55.794,18.837 56.896,19.939 56.896,26.162 CN5.3@56.261,26.797
  Solder Side w0.4: R21.1@53.401,17.448 C40.1@53.401,18.837
VAGC: R30.2 R33.2 | length 0.5
  Component Side w0.254: v1(101.83,18.185) R33.2@101.83,18.659
  other v3: 20.328,2.794
VFOIN: CN2.1 U2.8 | length 26.5
  Solder Side w0.4: U2.8@81.246,66.934 81.246,68.546 cw(c82.931,68.546) 82.931,70.231 95.377,70.231 cw(c95.377,68.58) 97.028,68.58 97.028,67.945 ccw(c98.552,67.945) 98.552,66.421 CN2.1@102.743,66.421
XTALA: SW1.2 X2.1 | length 30.7
  Component Side w0.4: X2.1@8.576,54.177 cw(c8.501,54.177) 8.501,54.102 3.841,54.102 ccw(c3.841,52.801) 2.54,52.801 2.54,42.224 ccw(c3.997,42.224) 3.997,40.767 11.881,40.767 cw(c11.881,39.948) 12.7,39.948 SW1.2@12.7,38.152
XTALB: SW2.2 X5.2 | length 44.1
  Component Side w0.4: X5.2@8.703,48.208 cw(c8.703,48.147) 8.763,48.147 8.763,45.974 ccw(c9.271,45.974) 9.271,45.466 39.751,45.466 ccw(c39.751,46.228) 40.513,46.228 40.513,47.752 cw(c41.021,47.752) 41.021,48.26 44.196,48.26 cw(c44.196,47.752) 44.704,47.752 44.704,47.117 ccw(c45.085,47.117) 45.085,46.736 SW2.2@46.938,46.736
pads on no net: B1.2 B2.2 U2.7 U6.7
copper on no net:
  other v4: 104.727,4.445 114.427,4.445 31.345,4.694 41.045,4.694
  other v5: 7.62,7.457

## Polygon pours and split planes (outlines as drawn)
GND on GND (split plane): 117.981,0.51 0.51,0.51 0.51,71.245 117.981,71.245
5V_MIXER on VCC (split plane): 84.886,70.86 84.929,70.832 84.957,70.789 84.966,70.745 84.965,70.739 84.965,59.944 84.966,59.935 84.957,59.844 84.928,59.748 84.881,59.66 84.817,59.582 84.739,59.518 84.651,59.471 84.555,59.442 84.464,59.433 84.455,59.434 64.389,59.434 64.381,59.433 64.289,59.44 64.192,59.464 64.099,59.502 64.014,59.555 63.938,59.62 63.873,59.696 63.82,59.781 63.782,59.874 63.758,59.971 63.751,60.063 63.752,60.071 63.752,64.389 63.751,64.396 63.759,64.456 63.785,64.518 63.826,64.571 63.879,64.612 63.941,64.638 64.001,64.646 64.008,64.645 81.661,64.645 81.793,64.654 81.923,64.679 82.049,64.722 82.168,64.781 82.278,64.854 82.378,64.942 82.466,65.042 82.539,65.152 82.598,65.271 82.641,65.397 82.666,65.527 82.675,65.659 82.675,69.469 82.675,70.485 82.674,70.491 82.681,70.56 82.703,70.632 82.738,70.699 82.786,70.757 82.844,70.805 82.911,70.84 82.983,70.862 83.052,70.869 83.058,70.868 84.836,70.868 84.842,70.869
5V_IF on VCC (split plane): 40.011,39.111 40.142,39.085 40.268,39.042 40.388,38.983 40.499,38.909 40.599,38.821 40.687,38.721 40.761,38.61 40.82,38.49 40.863,38.364 40.889,38.233 40.897,38.109 40.896,38.1 40.896,37.719 40.905,37.6 40.933,37.484 40.979,37.374 41.041,37.272 41.118,37.181 41.209,37.104 41.311,37.042 41.421,36.996 41.537,36.968 41.656,36.959 44.196,36.959 44.205,36.96 44.329,36.952 44.46,36.926 44.586,36.883 44.706,36.824 44.817,36.75 44.917,36.662 45.005,36.562 45.079,36.451 45.138,36.331 45.181,36.205 45.207,36.074 45.215,35.95 45.214,35.941 45.214,33.909 45.223,33.739 45.252,33.57 45.299,33.406 45.364,33.248 45.447,33.099 45.546,32.96 45.66,32.833 45.787,32.719 45.926,32.62 46.075,32.537 46.233,32.472 46.397,32.425 46.566,32.396 46.736,32.387 50.038,32.387 50.047,32.388 50.171,32.38 50.302,32.354 50.428,32.311 50.548,32.252 50.659,32.178 50.759,32.09 50.847,31.99 50.921,31.879 50.98,31.759 51.023,31.633 51.049,31.502 51.057,31.378 51.056,31.369 51.056,25.654 51.057,25.645 51.049,25.521 51.023,25.39 50.98,25.264 50.921,25.144 50.847,25.033 50.759,24.933 50.659,24.845 50.548,24.771 50.428,24.712 50.302,24.669 50.171,24.643 50.047,24.635 50.038,24.636 19.05,24.636 19.041,24.635 18.917,24.643 18.786,24.669 18.66,24.712 18.54,24.771 18.429,24.845 18.329,24.933 18.241,25.033 18.167,25.144 18.108,25.264 18.065,25.39 18.039,25.521 18.031,25.645 18.032,25.654 18.032,38.1 18.031,38.109 18.039,38.233 18.065,38.364 18.108,38.49 18.167,38.61 18.241,38.721 18.329,38.821 18.429,38.909 18.54,38.983 18.66,39.042 18.786,39.085 18.917,39.111 19.041,39.119 19.05,39.118 39.878,39.118 39.887,39.119
RX on VCC (split plane): 212 vertices, not listed, extent 42.165,0.51 117.474,16.255
VAGC on VCC (split plane): 300 vertices, not listed, extent 16.384,2.161 105.536,19.43
RX_5V on VCC (split plane): 314 vertices, not listed, extent 12.828,30.354 110.997,52.069
TX_5V on VCC (split plane): 280 vertices, not listed, extent 10.415,35.815 103.123,55.624
12V on VCC (split plane): 308 vertices, not listed, extent 0.51,0.51 117.981,71.245
TX on VCC (split plane): 3.224,16.119 3.265,16.092 3.292,16.051 3.301,16.008 3.3,16.002 3.3,2.794 3.3,2.79 3.308,2.678 3.33,2.563 3.368,2.453 3.419,2.349 3.484,2.252 3.561,2.164 3.649,2.087 3.746,2.022 3.85,1.971 3.96,1.933 4.075,1.911 4.187,1.903 4.191,1.903 57.531,1.903 57.533,1.903 57.664,1.912 57.795,1.938 57.921,1.98 58.04,2.039 58.151,2.113 58.251,2.201 58.339,2.301 58.413,2.412 58.472,2.531 58.514,2.657 58.54,2.788 58.549,2.919 97.79,2.919 97.792,2.919 97.947,2.928 98.101,2.954 98.252,2.997 98.397,3.057 98.534,3.133 98.662,3.224 98.779,3.329 98.884,3.446 98.975,3.574 99.051,3.711 99.111,3.856 99.154,4.007 99.18,4.161 99.189,4.316 99.189,4.318 99.189,6.096 99.188,6.104 99.196,6.229 99.222,6.359 99.265,6.485 99.323,6.604 99.397,6.714 99.485,6.814 99.585,6.902 99.695,6.976 99.814,7.034 99.94,7.077 100.07,7.103 100.195,7.111 100.203,7.11 100.457,7.11 100.466,7.111 100.606,7.102 100.753,7.073 100.894,7.025 101.028,6.959 101.153,6.876 101.265,6.777 101.364,6.665 101.447,6.54 101.513,6.406 101.561,6.265 101.59,6.118 101.599,5.978 101.598,5.969 101.598,0.51 0.51,0.51 0.51,16.127 3.175,16.127 3.181,16.128

## Keep-outs
Keep-Out Layer:
  the board outline again, w0.254

## Other copper
Component Side:
  rectangle net NetC18_2: 20.101,47.21 24.673,49.242
  rectangle net NetC17_2: 19.974,53.179 24.673,55.211
  rectangle net NetX3_2: 33.563,47.718 39.151,55.211
  region net GND: 97.409,36.576 97.917,36.068 97.79,35.941 97.79,34.163 94.869,34.163 94.615,33.909 60.325,33.909 59.309,34.925 59.436,35.052 59.436,36.576
  region net GND: 97.409,20.32 97.917,19.812 97.79,19.685 97.79,17.907 94.869,17.907 94.615,17.653 60.325,17.653 59.309,18.669 59.436,18.796 59.436,20.32
  region net GND: 97.155,3.556 97.663,3.048 97.536,2.921 97.536,1.143 94.615,1.143 94.361,0.889 60.071,0.889 59.055,1.905 59.182,2.032 59.182,3.556
  region net NetC1.3_2: 62.865,41.656 61.976,41.656 ccw(c61.976,41.402) 61.722,41.402 61.722,37.465 ccw(c61.849,37.465) 61.849,37.338 94.361,37.338 ccw(c94.361,37.592) 94.615,37.592 94.615,41.148 ccw(c94.107,41.148) 94.107,41.656 63.373,41.656 ccw(c63.373,41.529) 63.246,41.529
  region net NetCF5.3_2: 79.121,45.085 88.9,45.085 cw(c88.9,44.704) 89.281,44.704 89.281,43.18 cw(c89.027,43.18) 89.027,42.926 79.375,42.926 cw(c79.375,43.18) 79.121,43.18
  region net NetCF8.3_1: 90.043,45.085 93.98,45.085 cw(c93.98,44.958) 94.107,44.958 94.107,42.926 90.297,42.926 cw(c90.297,43.18) 90.043,43.18
  region net NetCF2.3_1: 78.359,43.053 cw(c78.232,43.053) 78.232,42.926 67.945,42.926 cw(c67.945,43.18) 67.691,43.18 67.691,44.831 cw(c67.945,44.831) 67.945,45.085 78.105,45.085 cw(c78.105,44.831) 78.359,44.831
  region net NetCF1.3_2: 62.103,44.958 cw(c62.23,44.958) 62.23,45.085 66.421,45.085 cw(c66.421,44.577) 66.929,44.577 66.929,43.18 cw(c66.675,43.18) 66.675,42.926 62.357,42.926 cw(c62.357,43.18) 62.103,43.18
  region net NetC1.2_2: 62.865,25.4 61.976,25.4 ccw(c61.976,25.146) 61.722,25.146 61.722,21.209 ccw(c61.849,21.209) 61.849,21.082 94.361,21.082 ccw(c94.361,21.336) 94.615,21.336 94.615,24.892 ccw(c94.107,24.892) 94.107,25.4 63.373,25.4 ccw(c63.373,25.273) 63.246,25.273
  region net NetCF2.2_1: 78.359,26.797 cw(c78.232,26.797) 78.232,26.67 67.945,26.67 cw(c67.945,26.924) 67.691,26.924 67.691,28.575 cw(c67.945,28.575) 67.945,28.829 78.105,28.829 cw(c78.105,28.575) 78.359,28.575
  region net NetCF5.2_2: 79.121,28.829 88.9,28.829 cw(c88.9,28.448) 89.281,28.448 89.281,26.924 cw(c89.027,26.924) 89.027,26.67 79.375,26.67 cw(c79.375,26.924) 79.121,26.924
  region net NetCF1.2_2: 62.103,28.702 cw(c62.23,28.702) 62.23,28.829 66.421,28.829 cw(c66.421,28.321) 66.929,28.321 66.929,26.924 cw(c66.675,26.924) 66.675,26.67 62.357,26.67 cw(c62.357,26.924) 62.103,26.924
  region net NetCF8.2_1: 90.043,28.829 93.98,28.829 cw(c93.98,28.702) 94.107,28.702 94.107,26.67 90.297,26.67 cw(c90.297,26.924) 90.043,26.924
  region net NetCF8.1_1: 89.789,12.065 93.726,12.065 cw(c93.726,11.938) 93.853,11.938 93.853,9.906 90.043,9.906 cw(c90.043,10.16) 89.789,10.16
  region net NetCF1.1_2: 61.849,11.938 cw(c61.976,11.938) 61.976,12.065 66.167,12.065 cw(c66.167,11.557) 66.675,11.557 66.675,10.16 cw(c66.421,10.16) 66.421,9.906 62.103,9.906 cw(c62.103,10.16) 61.849,10.16
  region net NetCF2.1_1: 78.105,10.033 cw(c77.978,10.033) 77.978,9.906 67.691,9.906 cw(c67.691,10.16) 67.437,10.16 67.437,11.811 cw(c67.691,11.811) 67.691,12.065 77.851,12.065 cw(c77.851,11.811) 78.105,11.811
  region net NetCF5.1_2: 78.867,12.065 88.646,12.065 cw(c88.646,11.684) 89.027,11.684 89.027,10.16 cw(c88.773,10.16) 88.773,9.906 79.121,9.906 cw(c79.121,10.16) 78.867,10.16
  region net NetC1.1_2: 62.611,8.636 61.722,8.636 ccw(c61.722,8.382) 61.468,8.382 61.468,4.445 ccw(c61.595,4.445) 61.595,4.318 94.107,4.318 ccw(c94.107,4.572) 94.361,4.572 94.361,8.128 ccw(c93.853,8.128) 93.853,8.636 63.119,8.636 ccw(c63.119,8.509) 62.992,8.509
  region net NetC51_2: 20.074,14.738 cw(c19.82,14.738) 19.82,14.484 18.042,14.484 cw(c18.042,14.738) 17.788,14.738 17.788,17.024 cw(c17.915,17.024) 17.915,17.151 19.947,17.151 cw(c19.947,17.024) 20.074,17.024
  region net NetC12_2: 52.544,54.674 49.623,54.674 ccw(c49.623,54.42) 49.369,54.42 49.369,53.277 52.671,53.277 52.671,54.039
  region net NetC15_2: 50.385,67.755 53.687,67.755 cw(c53.687,67.12) 54.322,67.12 54.322,65.342 cw(c54.068,65.342) 54.068,65.088 53.687,65.088 cw(c53.687,65.723) 53.052,65.723 53.052,65.977 ccw(c52.544,65.977) 52.544,66.485 51.274,66.485 cw(c51.274,66.612) 51.147,66.612
  region net NetL3_2: 47.718,65.088 47.718,67.501 cw(c47.972,67.501) 47.972,67.755 49.369,67.755 cw(c49.369,67.628) 49.496,67.628 49.496,65.215
  region net NetC26_1: 78.96,57.595 77.055,57.595 76.674,57.976 76.674,58.865 cw(c76.928,58.865) 76.928,59.119 77.055,59.119 ccw(c77.055,59.373) 77.309,59.373 77.309,60.26 cw(c77.555,60.26) 77.555,60.506 78.843,60.506 cw(c78.843,60.389) 78.96,60.389
  region net NetB1_4: 82.897,64.834 78.833,64.834 ccw(c78.833,64.707) 78.706,64.707 78.706,61.532 ccw(c78.833,61.532) 78.833,61.405 79.722,61.405 ccw(c79.722,61.659) 79.976,61.659 79.976,63.945 cw(c80.103,63.945) 80.103,64.072 82.643,64.072 ccw(c82.643,64.199) 82.77,64.199
  region net NetC26_2: 74.769,60.081 cw(c74.769,59.827) 75.023,59.827 75.023,59.319 ccw(c75.15,59.319) 75.15,59.192 75.785,59.192 cw(c75.785,59.065) 75.912,59.065 75.912,57.795 cw(c75.658,57.795) 75.658,57.541 73.499,57.541 cw(c73.499,57.668) 73.372,57.668 73.372,59.954 cw(c73.499,59.954) 73.499,60.081
VCC (plane layer: these items are gaps in the copper):
  lines w0.254: 0,16.256 3.175,16.256 cw(c3.175,16.002) 3.429,16.002 3.429,2.794 ccw(c4.191,2.794) 4.191,2.032 57.531,2.032 ccw(c57.531,2.921) 58.42,2.921 cw(c58.547,2.921) 58.547,3.048 97.79,3.048 ccw(c97.79,4.318) 99.06,4.318 99.06,6.096 cw(c100.203,6.096) 100.203,7.239 100.457,7.239 cw(c100.457,5.969) 101.727,5.969 101.727,0.381 ; 16.256,2.159 16.256,7.239 cw(c16.891,7.239) 16.891,7.874 29.845,7.874 38.227,7.874 ccw(c38.227,9.144) 39.497,9.144 39.497,17.018 cw(c40.767,17.018) 40.767,18.288 47.625,18.288 cw(c47.625,17.018) 48.895,17.018 48.895,8.763 ccw(c50.038,8.763) 50.038,7.62 53.016,7.62 53.922,7.62 ccw(c53.922,8.308) 54.61,8.308 54.61,9.906 cw(c55.88,9.906) 55.88,11.176 92.075,11.176 ccw(c92.075,12.446) 93.345,12.446 93.345,13.208 cw(c94.615,13.208) 94.615,14.478 98.679,14.478 ccw(c98.679,15.748) 99.949,15.748 99.949,18.288 cw(c101.219,18.288) 101.219,19.558 104.775,19.558 cw(c104.775,18.669) 105.664,18.669 105.664,12.573 ; 42.037,2.159 42.037,15.113 cw(c43.307,15.113) 43.307,16.383 44.45,16.383 44.831,16.383 cw(c44.831,15.621) 45.593,15.621 45.593,4.318 ccw(c45.974,4.318) 45.974,3.937 55.88,3.937 ccw(c55.88,5.207) 57.15,5.207 cw(c58.039,5.207) 58.039,6.096 94.488,6.096 ccw(c94.488,7.366) 95.758,7.366 95.758,10.16 cw(c96.774,10.16) 96.774,11.176 102.616,11.176 ; 102.616,11.303 cw(c103.886,11.303) 103.886,12.573 116.332,12.573 cw(c116.332,11.303) 117.602,11.303 117.602,0.254 ccw(c117.856,0.254) 117.856,0 ; 103.251,39.878 103.251,51.308 ccw(c102.235,51.308) 102.235,52.324 77.851,52.324 cw(c77.851,52.959) 77.216,52.959 77.216,53.848 ccw(c76.454,53.848) 76.454,54.61 71.247,54.61 70.104,55.753 61.976,55.753 60.833,54.61 55.626,54.61 ccw(c55.626,53.34) 54.356,53.34 54.356,50.419 cw(c53.467,50.419) 53.467,49.53 42.545,49.53 ccw(c42.545,48.26) 41.275,48.26 41.275,43.815 cw(c40.005,43.815) 40.005,42.545 11.303,42.545 ccw(c11.303,41.529) 10.287,41.529 10.287,36.322 ccw(c10.922,36.322) 10.922,35.687 12.192,35.687 ccw(c12.192,36.195) 12.7,36.195 ; 12.7,36.195 ccw(c13.208,36.195) 13.208,35.687 14.859,35.687 ccw(c14.859,36.068) 15.24,36.068 15.24,39.497 cw(c16.002,39.497) 16.002,40.259 44.958,40.259 ccw(c44.958,41.529) 46.228,41.529 46.228,45.974 cw(c46.609,45.974) 46.609,46.355 56.642,46.355 ccw(c56.642,47.498) 57.785,47.498 57.785,49.149 cw(c58.801,49.149) 58.801,50.165 72.136,50.165 73.025,49.276 76.581,49.276 77.47,50.165 97.663,50.165 cw(c97.663,49.022) 98.806,49.022 98.806,40.005 ccw(c100.076,40.005) 100.076,38.735 107.95,38.735 cw(c107.95,37.465) 109.22,37.465 109.22,31.115 ccw(c110.109,31.115) 110.109,30.226 110.617,30.226 ccw(c110.617,30.734) 111.125,30.734 111.125,38.608 ccw(c109.855,38.608) 109.855,39.878 101.219,39.878 cw(c101.219,41.021) 100.076,41.021 100.076,50.038 ccw(c98.806,50.038) 98.806,51.308 75.692,51.308 cw(c75.692,51.689) 75.311,51.689 ccw(c74.803,51.689) 74.803,52.197 57.531,52.197 ccw(c57.531,50.927) 56.261,50.927 56.261,48.133 cw(c55.626,48.133) 55.626,47.498 44.831,47.498 ccw(c44.831,46.609) 43.942,46.609 43.942,42.418 cw(c42.926,42.418) 42.926,41.402 13.97,41.402 ccw(c13.97,40.132) 12.7,40.132 12.7,37.338 12.7,36.195
  lines w0.5: 22.86,39.37 19.05,39.37 ; 19.05,39.37 ccw(c19.05,38.1) 17.78,38.1 17.78,25.654 ccw(c19.05,25.654) 19.05,24.384 50.038,24.384 ccw(c50.038,25.654) 51.308,25.654 51.308,31.369 ccw(c50.038,31.369) 50.038,32.639 46.736,32.639 cw(c46.736,33.909) 45.466,33.909 45.466,35.941 ccw(c44.196,35.941) 44.196,37.211 41.656,37.211 cw(c41.656,37.719) 41.148,37.719 41.148,38.1 ccw(c39.878,38.1) 39.878,39.37 19.05,39.37 ; 63.5,60.071 ccw(c64.389,60.071) 64.389,59.182 84.455,59.182 ccw(c84.455,59.944) 85.217,59.944 85.217,70.739 ccw(c84.836,70.739) 84.836,71.12 83.82,71.12 83.058,71.12 ccw(c83.058,70.485) 82.423,70.485 82.423,69.469 82.423,65.659 cw(c81.661,65.659) 81.661,64.897 64.008,64.897 ccw(c64.008,64.389) 63.5,64.389 63.5,60.071

## Silkscreen, mask and mechanical layers (free items; w line width, h text height)
Top Overlay:
  lines w0.2: 0.958,12.827 0.958,27.735 0.958,29.005 14.039,29.005 14.039,12.827 ; 14.867,1.149 14.867,23.501 26.678,23.501 26.678,1.149 14.867,1.149
  text "VFO IN" at 102.616,70.612 h1.2
  text "PA OUT" at 94.361,64.516 h1.2
  text "NAVARRO ELETRÔNICA / PY1CX - MAY/2016 / PCB SSB V1.00 TRI / ARARINHA 6 BY: / PY2OHH - MIGUEL" at 5.842,62.357 h1.8
  text "PA CNTR" at 39.624,61.849 h1.2
  text "XTAL FILTER" at 2.956,59.91 h1.5
  text "RX ANT" at 113.284,29.464 h1.2
  text "AGC" at 15.248,22.866 h1.5 r270
  text "MIC PRE" at 5.334,12.446 h1.5
  text "AGC ADJ" at 15.375,9.658 h1.5

## Text inside footprints (layer, text, board x,y; h text height)
C52: Top Overlay "+" at 26.279,11.451 h2 r180
CN3: Top Overlay "1" at 54.997,40.761 h1.5
CN5: Top Overlay "1" at 55.765,33.812 h1.5 r270
CN6: Top Overlay "4" at 97.79,50.038 h1.5; Top Overlay "1" at 86.741,50.038 h1.5
CN9: Top Overlay "7" at 43.815,66.167 h1.5; Top Overlay "1" at 24.765,66.04 h1.5
Q1: Mechanical 15 "3" at 53.092,55.89 h1; Mechanical 15 "2" at 54.049,53.665 h1; Mechanical 15 "1" at 52.208,53.616 h1
Q2: Mechanical 15 "3" at 9.346,16.519 h1 r270; Mechanical 15 "2" at 7.121,15.562 h1 r270; Mechanical 15 "1" at 7.071,17.402 h1 r270
Q3: Mechanical 15 "3" at 75.79,60.857 h1 r270; Mechanical 15 "2" at 73.565,59.9 h1 r270; Mechanical 15 "1" at 73.516,61.74 h1 r270
Q4: Mechanical 15 "3" at 79,61.664 h1; Mechanical 15 "2" at 79.957,59.439 h1; Mechanical 15 "1" at 78.116,59.39 h1
Q5: Mechanical 15 "3" at 31.571,28.33 h1 r270; Mechanical 15 "2" at 29.346,27.373 h1 r270; Mechanical 15 "1" at 29.296,29.213 h1 r270
Q6: Mechanical 15 "3" at 29.458,17.686 h1 r90; Mechanical 15 "2" at 31.683,18.643 h1 r90; Mechanical 15 "1" at 31.732,16.803 h1 r90
Q7: Mechanical 15 "3" at 20.622,18.173 h1; Mechanical 15 "2" at 21.579,15.948 h1; Mechanical 15 "1" at 19.739,15.898 h1
Q8: Mechanical 15 "1" at 103.244,20.653 h1 r270; Mechanical 15 "2" at 103.294,18.813 h1 r270; Mechanical 15 "3" at 105.519,19.77 h1 r270
Q9: Mechanical 15 "1" at 107.435,15.7 h1 r270; Mechanical 15 "2" at 107.485,13.86 h1 r270; Mechanical 15 "3" at 109.71,14.817 h1 r270
U1: Top Overlay "1" at 91.059,69.215 h0.8
U3: Top Overlay "1" at 56.367,63.043 h0.8 r270
U4: Top Overlay "1" at 47.046,37.12 h0.8 r180
U7: Top Overlay "1" at 109.614,36.309 h0.8 r270
U8: Top Overlay "1" at 101.74,36.817 h0.8 r270